# EAGLE board Encoders (EAGLE 7.4.0)
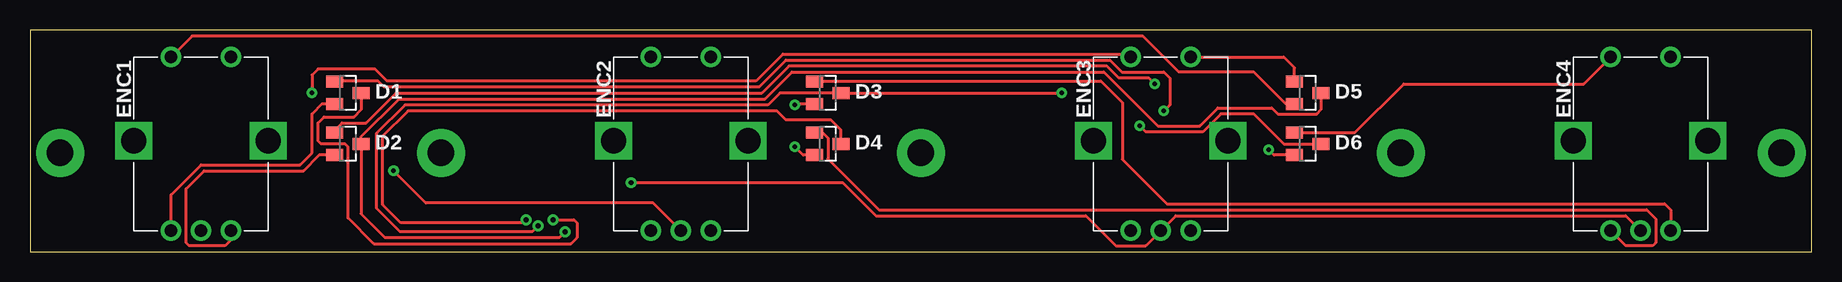
[diagram p0: board, top side]
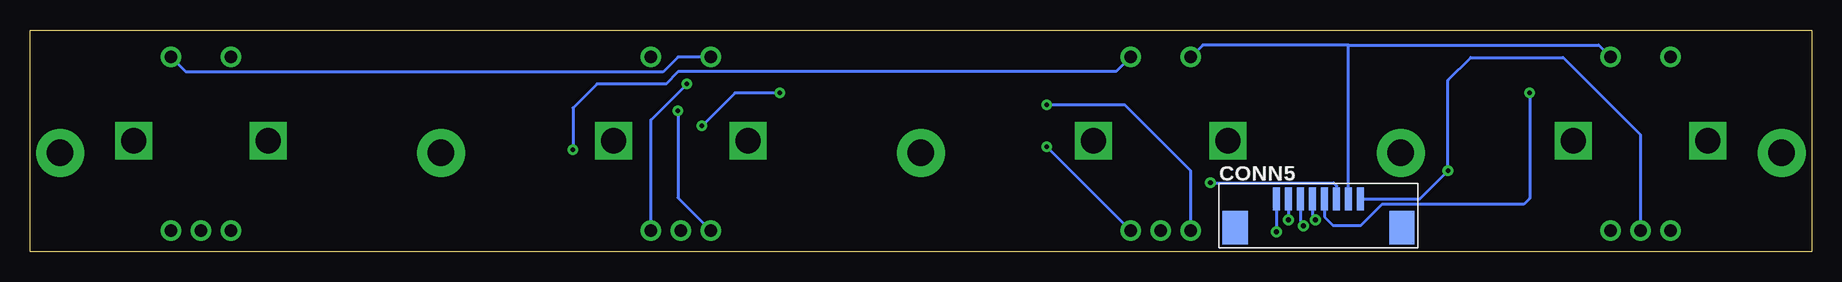
[diagram p1: board, bottom side, seen from below]

Size 148.5 x 18.5 mm. Coordinates in mm from the lower left corner, seen from the top.
Outline: 0,0 148.5,0 148.5,18.5 0,18.5 0,0
Copper layers (1*16): Top 0.035mm / dielectric 1.5mm / Bottom 0.035mm
Design rules "smiery": minimum track width 10mil, minimum drill 12mil, track to track 7mil, track to pad 5mil, pad to pad 5mil, via to via 6mil, smd to smd 0mil, copper to edge 12mil, drill to drill 10mil, minimum pad ring 13mil, minimum via ring 10mil, stop-mask expansion 2mil, vias tented up to drill 25mil, thermal gap 10mil
Net classes: 0 default: width 0.203 mm

## Footprints (pad centres in the part's own frame; a part is rotated, then mirrored left to right if it is on the bottom)
MOLEX-52793-0870 = smd 0.6 x 1.9: 1 -3.5,1.4; 2 -2.5,1.4; 3 -1.5,1.4; 4 -0.5,1.4; 5 0.5,1.4; 6 1.5,1.4; 7 2.5,1.4; 8 3.5,1.4 | smd 2.1 x 2.8: P1 -6.95,-1; P2 6.95,-1
SOT23 = smd 1.4 x 1: 1 -1.1,0.95; 2 -1.1,-0.95; 3 1.1,0
PEC12R-42XXF-S0024 = drill 1.016: A -2.5,-7.5; B 2.5,-7.5; C 0,-7.5; SW1 -2.5,7; SW2 2.5,7 | drill 2.1 square: S1 -5.6,0; S2 5.6,0

## Placement (x,y rotation side)
CONN5  PINHD-1X08-FFC-1MM  [MOLEX-52793-0870]  41.1,3 0 bottom
D1  BAW56  [SOT23]  26.5,13.25 0 top
D2  BAW56  [SOT23]  26.5,9 0 top
D3  BAW56  [SOT23]  66.5,13.25 0 top
D4  BAW56  [SOT23]  66.5,9 0 top
D5  BAW56  [SOT23]  106.5,13.25 0 top
D6  BAW56  [SOT23]  106.5,9 0 top
ENC1  BOURNS-PEC12R-4XXXF-SXXXX  [PEC12R-42XXF-S0024]  14.25,9.25 0 top
ENC2  BOURNS-PEC12R-4XXXF-SXXXX  [PEC12R-42XXF-S0024]  54.25,9.25 0 top
ENC3  BOURNS-PEC12R-4XXXF-SXXXX  [PEC12R-42XXF-S0024]  94.25,9.25 0 top
ENC4  BOURNS-PEC12R-4XXXF-SXXXX  [PEC12R-42XXF-S0024]  134.25,9.25 0 top

## Library data of the parts
CONN5 ENC1-ENC4 = igor_lbr
D1-D6 = igor_lbr; MANUFACTURER: Multicomp; MPN: BAW56-7-F

## Nets
BC_5: CONN5.6 ENC3.C ENC4.C
BC_6: CONN5.5 ENC3.SW1 ENC4.SW2
BC_7: CONN5.8 ENC1.C ENC2.C
BC_8: CONN5.7 ENC1.SW2 ENC2.SW1
BR_1: CONN5.2 D1.3
BR_2: CONN5.1 D2.3 D5.3
BR_3: CONN5.3 D3.3 D6.3
BR_4: CONN5.4 D4.3
E1_A: D1.2 ENC1.A
E1_B: D2.2 ENC1.B
E1_SWR: D5.2 ENC1.SW1
E2_A: D3.2 ENC2.A
E2_B: D4.2 ENC2.B
E2_SWR: D6.2 ENC2.SW2
E3_A: D1.1 ENC3.A
E3_B: D2.1 ENC3.B
E3_SWR: D5.1 ENC3.SW2
E4_A: D3.1 ENC4.B
E4_B: D4.1 ENC4.A
E4_SWR: D6.1 ENC4.SW1

## Tracks (layer width: path | path; a pad name or v marks a point on that pad's centre or on a via)
BC_5  (via drill 0.4 pad 0.6)
  Top 0.254: ENC4.C 133,3 95.5,3 ENC3.C 93,0.5 90.5,0.5 88,3 70.5,3 67.75,5.75 v50.1,5.75
  Bottom 0.254: v50.1,5.75 39.85,5.75 39.6,5.5 CONN5.6
BC_6  (via drill 0.4 pad 0.6)
  Top 0.254: v23.5,13.25 23.5,14.75 24,15.25 28.75,15.25 29.75,14.25 60.5,14.25 62.75,16.5 91.5,16.5 ENC3.SW1
  Bottom 0.254: v23.5,13.25 23.5,4.45 24,3.95 35.8,3.95 37.6,2.15 39.85,2.15 40.6,2.9 CONN5.5 | ENC4.SW2 135.5,15 95.75,15 94.5,16.25 ENC3.SW1
BC_7  (via drill 0.4 pad 0.6)
  Top 0.254: ENC2.C 51.94,4.06 32.99,4.06 v30.3,6.75
  Bottom 0.254: CONN5.8 32.65,4.4 v30.3,6.75 30.3,14.3 28.4,16.2 20.7,16.2 14.25,9.75 ENC1.C
BC_8
  Bottom 0.254: CONN5.7 38.6,17.25 | 38.6,17.25 50.75,17.25 ENC2.SW1 | 38.6,17.25 17.75,17.25 ENC1.SW2
BR_1  (via drill 0.4 pad 0.6)
  Top 0.254: D1.3 27.6,11.85 27,11.25 24.5,11.25 24,10.75 24,9.25 24.25,9 26.25,9 26.5,8.75 26.5,2.8 28.65,0.65 45.1,0.65 45.6,1.15 45.6,2.4 45.35,2.65 v43.6,2.65
  Bottom 0.254: CONN5.2 v43.6,2.65
BR_2  (via drill 0.4 pad 0.6)
  Top 0.254: D5.3 107.6,11.85 107.25,11.5 104,11.5 103.5,12 99,12 97.5,10.5 94,10.5 89.5,15 63.5,15 61.25,12.75 30.75,12.75 27.6,9.6 D2.3 27.6,3.15 29.6,1.15 44.1,1.15 v44.6,1.65
  Bottom 0.254: CONN5.1 v44.6,1.65
BR_3  (via drill 0.4 pad 0.6)
  Top 0.254: D6.3 104.5,9 102,11.5 99.25,11.5 97.75,10 93,10 v92.5,10.5 | v86,13.25 D3.3 62.5,13.25 61.5,12.25 31.25,12.25 28.9,9.9 28.9,3.6 30.85,1.65 41.85,1.65 v42.35,2.15
  Bottom 0.254: v86,13.25 89.75,13.25 v92.5,10.5 | CONN5.3 42.6,2.4 v42.35,2.15
BR_4  (via drill 0.4 pad 0.6)
  Top 0.254: D4.3 67.6,10.15 66.75,11 63,11 62.25,11.75 31.5,11.75 29.4,9.65 29.4,3.9 30.9,2.4 41.1,2.4 v41.35,2.65
  Bottom 0.254: CONN5.4 41.6,2.9 v41.35,2.65
E1_A
  Top 0.254: ENC1.A 11.75,4.75 14.25,7.25 22.5,7.25 23.5,8.25 23.5,11.5 24.3,12.3 D1.2
E1_B
  Top 0.254: D2.2 24.1,8.05 22.8,6.75 14.5,6.75 13,5.25 13,0.75 13.25,0.5 16.25,0.5 16.75,1 ENC1.B
E1_SWR
  Top 0.254: D5.2 104.7,12.3 102,15 95.75,15 92.75,18 13.5,18 ENC1.SW1
E2_A  (via drill 0.4 pad 0.6)
  Top 0.254: D3.2 63.8,12.3 v63.75,12.25
  Bottom 0.254: ENC2.A 51.75,6.75 57.25,12.25 v63.75,12.25
E2_B  (via drill 0.4 pad 0.6)
  Top 0.254: D4.2 64.45,8.05 v63.75,8.75
  Bottom 0.254: ENC2.B v63.75,8.75
E2_SWR  (via drill 0.4 pad 0.6)
  Top 0.254: D6.2 103.7,8.05 v103.25,8.5
  Bottom 0.254: v103.25,8.5 103.25,12 101.25,14 95.5,14 94.45,15.05 57.95,15.05 ENC2.SW2
E3_A  (via drill 0.4 pad 0.6)
  Top 0.254: v94.5,11.75 95,12.25 95,14.5 94.5,15 91,15 90,16 63,16 60.75,13.75 29.5,13.75 29,14.25 25.45,14.25 D1.1
  Bottom 0.254: v94.5,11.75 94.5,4.5 ENC3.A
E3_B  (via drill 0.4 pad 0.6)
  Top 0.254: D2.1 25.4,10.15 26,10.75 28,10.75 30.5,13.25 61,13.25 63.25,15.5 89.75,15.5 90.75,14.5 93.25,14.5 v93.75,14
  Bottom 0.254: ENC3.B 96.75,11 v93.75,14
E3_SWR
  Top 0.254: D5.1 105.4,15.35 104.5,16.25 ENC3.SW2
E4_A
  Top 0.254: D3.1 65.45,14.2 65.5,14.25 89.25,14.25 91.05,12.45 91.05,7.7 94.75,4 136.25,4 136.75,3.5 ENC4.B
E4_B
  Top 0.254: D4.1 66.05,9.95 66.5,9.5 66.5,7.75 70.75,3.5 134.75,3.5 135.5,2.75 135.5,0.75 135.25,0.5 133,0.5 ENC4.A
E4_SWR
  Top 0.254: D6.1 110.45,9.95 114.5,14 129.5,14 ENC4.SW1
N$1  (via drill 2.2 pad 4)
  other vias: 2.5,8.25
N$2  (via drill 2.2 pad 4)
  other vias: 146,8.25
N$3  (via drill 2.2 pad 4)
  other vias: 34.25,8.25
N$4  (via drill 2.2 pad 4)
  other vias: 74.25,8.25
N$5  (via drill 2.2 pad 4)
  other vias: 114.25,8.25